# EAGLE board CT_schematic (EAGLE 7.6.0)

Size 100 x 80 mm. Coordinates in mm from the lower left corner, seen from the top.
Outline: 0,0 100,0 100,80 0,80 0,0
Copper layers (1*16): Top 0.035mm / dielectric 1.5mm / Bottom 0.035mm
Design rules "default": minimum track width 10mil, minimum drill 24mil, track to track 8mil, track to pad 8mil, pad to pad 8mil, via to via 8mil, smd to smd 8mil, copper to edge 40mil, drill to drill 8mil, minimum pad ring 10mil, minimum via ring 8mil, stop-mask expansion 4mil, vias tented up to drill 0mil, thermal gap 10mil

## Footprints (pad centres in the part's own frame; a part is rotated, then mirrored left to right if it is on the bottom)
C0603 = smd 0.8 x 0.8: 1 -0.762,0; 2 0.762,0
C0402 = smd 0.5 x 0.5: 1 -0.508,0; 2 0.508,0
C0805 = smd 1.2 x 1.3: 1 -1.016,0; 2 1.016,0
C1210 = smd 1.2 x 2.5: 1 -1.524,0; 2 1.524,0
2220 = smd 1.85 x 5.5: 1 -2.55,0; 2 2.55,0
R0603 = smd 0.8 x 0.8: 1 -0.762,0; 2 0.762,0
EXV-9H = smd 3.505 x 1.676: 1 -2.857,0; 2 2.857,0
L0603 = smd 0.8 x 0.8: 1 -0.762,0; 2 0.762,0
L1210 = smd 1.2 x 2.5: 1 -1.524,0; 2 1.524,0
DR1040 = smd 1.6 x 3.2: 1 -4.458,0; 2 4.458,0
PJ-037B_PACKAGE = drill 3.7 square: 1 12,0 | drill 3.2 square: 2 6,0
TFBGA216 = smd 0.4 x 0.4: A1 -5.6,5.6; A2 -4.8,5.6; A3 -4,5.6; A4 -3.2,5.6; A5 -2.4,5.6; A6 -1.6,5.6; A7 -0.8,5.6; A8 0,5.6; A9 0.8,5.6; A10 1.6,5.6; A11 2.4,5.6; A12 3.2,5.6; A13 4,5.6; A14 4.8,5.6; A15 5.6,5.6; B1 -5.6,4.8; B2 -4.8,4.8; B3 -4,4.8; B4 -3.2,4.8; B5 -2.4,4.8; B6 -1.6,4.8; B7 -0.8,4.8; B8 0,4.8; B9 0.8,4.8; B10 1.6,4.8; B11 2.4,4.8; B12 3.2,4.8; B13 4,4.8; B14 4.8,4.8; B15 5.6,4.8; C1 -5.6,4; C2 -4.8,4; C3 -4,4; C4 -3.2,4; C5 -2.4,4; C6 -1.6,4; C7 -0.8,4; C8 0,4; C9 0.8,4; C10 1.6,4; C11 2.4,4; C12 3.2,4; C13 4,4; C14 4.8,4; C15 5.6,4; D1 -5.6,3.2; D2 -4.8,3.2; D3 -4,3.2; D4 -3.2,3.2; D5 -2.4,3.2; D6 -1.6,3.2; D7 -0.8,3.2; D8 0,3.2; D9 0.8,3.2; D10 1.6,3.2; D11 2.4,3.2; D12 3.2,3.2; D13 4,3.2; D14 4.8,3.2; D15 5.6,3.2; E1 -5.6,2.4; E2 -4.8,2.4; E3 -4,2.4; E4 -3.2,2.4; E5 -2.4,2.4; E6 -1.6,2.4; E7 -0.8,2.4; E8 0,2.4; E9 0.8,2.4; E10 1.6,2.4; E11 2.4,2.4; E12 3.2,2.4; E13 4,2.4; E14 4.8,2.4; E15 5.6,2.4; F1 -5.6,1.6; F2 -4.8,1.6; F3 -4,1.6; F4 -3.2,1.6; F5 -2.4,1.6; F6 -1.6,1.6; F7 -0.8,1.6; F8 0,1.6; F9 0.8,1.6; F10 1.6,1.6; F11 2.4,1.6; F12 3.2,1.6; F13 4,1.6; F14 4.8,1.6; F15 5.6,1.6; G1 -5.6,0.8; G2 -4.8,0.8; G3 -4,0.8; G4 -3.2,0.8; G5 -2.4,0.8; G6 -1.6,0.8; G10 1.6,0.8; G11 2.4,0.8; G12 3.2,0.8; G13 4,0.8; G14 4.8,0.8; G15 5.6,0.8; H1 -5.6,0; H2 -4.8,0; H3 -4,0; H4 -3.2,0; H5 -2.4,0; H6 -1.6,0; H10 1.6,0; H11 2.4,0; H12 3.2,0; H13 4,0; H14 4.8,0; H15 5.6,0; J1 -5.6,-0.8; J2 -4.8,-0.8; J3 -4,-0.8; J4 -3.2,-0.8; J5 -2.4,-0.8; J6 -1.6,-0.8; J10 1.6,-0.8; J11 2.4,-0.8; J12 3.2,-0.8; J13 4,-0.8; J14 4.8,-0.8; J15 5.6,-0.8; K1 -5.6,-1.6; K2 -4.8,-1.6; K3 -4,-1.6; K4 -3.2,-1.6; K5 -2.4,-1.6; K6 -1.6,-1.6; K7 -0.8,-1.6; K8 0,-1.6; K9 0.8,-1.6; K10 1.6,-1.6; K11 2.4,-1.6; K12 3.2,-1.6; K13 4,-1.6; K14 4.8,-1.6; K15 5.6,-1.6; L1 -5.6,-2.4; L2 -4.8,-2.4; L3 -4,-2.4; L4 -3.2,-2.4; L5 -2.4,-2.4; L6 -1.6,-2.4; L7 -0.8,-2.4; L8 0,-2.4; L9 0.8,-2.4; L10 1.6,-2.4; L11 2.4,-2.4; L12 3.2,-2.4; L13 4,-2.4; L14 4.8,-2.4; L15 5.6,-2.4; M1 -5.6,-3.2; M2 -4.8,-3.2; M3 -4,-3.2; M4 -3.2,-3.2; M5 -2.4,-3.2; M6 -1.6,-3.2; M7 -0.8,-3.2; M8 0,-3.2; M9 0.8,-3.2; M10 1.6,-3.2; M11 2.4,-3.2; M12 3.2,-3.2; M13 4,-3.2; M14 4.8,-3.2; M15 5.6,-3.2; N1 -5.6,-4; N2 -4.8,-4; N3 -4,-4; N4 -3.2,-4; N5 -2.4,-4; N6 -1.6,-4; N7 -0.8,-4; N8 0,-4; N9 0.8,-4; N10 1.6,-4; N11 2.4,-4; N12 3.2,-4; N13 4,-4; N14 4.8,-4; N15 5.6,-4; P1 -5.6,-4.8; P2 -4.8,-4.8; P3 -4,-4.8; P4 -3.2,-4.8; P5 -2.4,-4.8; P6 -1.6,-4.8; P7 -0.8,-4.8; P8 0,-4.8; P9 0.8,-4.8; P10 1.6,-4.8; P11 2.4,-4.8; P12 3.2,-4.8; P13 4,-4.8; P14 4.8,-4.8; P15 5.6,-4.8; R1 -5.6,-5.6; R2 -4.8,-5.6; R3 -4,-5.6; R4 -3.2,-5.6; R5 -2.4,-5.6; R6 -1.6,-5.6; R7 -0.8,-5.6; R8 0,-5.6; R9 0.8,-5.6; R10 1.6,-5.6; R11 2.4,-5.6; R12 3.2,-5.6; R13 4,-5.6; R14 4.8,-5.6; R15 5.6,-5.6
SSOP-20 = smd 1.651 x 0.432: 1 -3.48,2.925; 2 -3.48,2.275; 3 -3.48,1.625; 4 -3.48,0.975; 5 -3.48,0.325; 6 -3.48,-0.325; 7 -3.48,-0.975; 8 -3.48,-1.625; 9 -3.48,-2.275; 10 -3.48,-2.925; 11 3.48,-2.925; 12 3.48,-2.275; 13 3.48,-1.625; 14 3.48,-0.975; 15 3.48,-0.325; 16 3.48,0.325; 17 3.48,0.975; 18 3.48,1.625; 19 3.48,2.275; 20 3.48,2.925
182-009-MALE = drill 1.194 pad 1.524 octagon: 1 -5.537,10.923; 2 -2.769,10.923; 3 0,10.923; 4 2.769,10.923; 5 5.537,10.923; 6 -4.153,8.08; 7 -1.384,8.08; 8 1.384,8.08; 9 4.153,8.08 | hole 3.048: -12.446,9.501; 12.446,9.501
PC28F512P33BFD = smd 0.45 x 0.45: A1 0,0; A2 1,0; A3 2,0; A4 3,0; A5 4,0; A6 5,0; A7 6,0; A8 7,0; B1 0,-1; B2 1,-1; B3 2,-1; B4 3,-1; B5 4,-1; B6 5,-1; B7 6,-1; B8 7,-1; C1 0,-2; C2 1,-2; C3 2,-2; C4 3,-2; C5 4,-2; C6 5,-2; C7 6,-2; C8 7,-2; D1 0,-3; D2 1,-3; D3 2,-3; D4 3,-3; D5 4,-3; D6 5,-3; D7 6,-3; D8 7,-3; E1 0,-4; E2 1,-4; E3 2,-4; E4 3,-4; E5 4,-4; E6 5,-4; E7 6,-4; E8 7,-4; F1 0,-5; F2 1,-5; F3 2,-5; F4 3,-5; F5 4,-5; F6 5,-5; F7 6,-5; F8 7,-5; G1 0,-6; G2 1,-6; G3 2,-6; G4 3,-6; G5 4,-6; G6 5,-6; G7 6,-6; G8 7,-6; H1 0,-7; H2 1,-7; H3 2,-7; H4 3,-7; H5 4,-7; H6 5,-7; H7 6,-7; H8 7,-7
VQFN-16 = smd 1.105 x 0.381: 1 -1.822,0.975; 2 -1.822,0.325; 3 -1.822,-0.325; 4 -1.822,-0.975; 9 1.822,-0.975; 10 1.822,-0.325; 11 1.822,0.325; 12 1.822,0.975 | smd 0.381 x 1.105: 5 -0.975,-1.822; 6 -0.325,-1.822; 7 0.325,-1.822; 8 0.975,-1.822; 13 0.975,1.822; 14 0.325,1.822; 15 -0.325,1.822; 16 -0.975,1.822
HTSS-105-01-G-D = drill 1 pad 1.8 square: 1 0,0 | drill 1 pad 1.8: 2 0,2.54; 3 2.54,0; 4 2.54,2.54; 5 5.08,0; 6 5.08,2.54; 7 7.62,0; 8 7.62,2.54; 9 10.16,0; 10 10.16,2.54
ABS07-32.768KHZ-7-T = smd 1.1 x 2.4: 1 -2.5,0; 2 0,0
ABLS-25.000MHZ-B2F-T = smd 5.6 x 2.8: 1 -3.81,0; 2 5.69,0
WSON-8 = smd 0.3 x 0.6: 1 -0.75,0; 2 0.05,0; 3 0.85,0; 4 1.65,0; 5 1.65,3.8; 6 0.85,3.8; 7 0.05,3.8; 8 -0.75,3.8 | smd 3 x 2.6: PAD 0.45,1.9
QFN-16_EP = smd 0.805 x 0.3: 1 -1.452,0.75; 2 -1.452,0.25; 3 -1.452,-0.25; 4 -1.452,-0.75; 9 1.452,-0.75; 10 1.452,-0.25; 11 1.452,0.25; 12 1.452,0.75 | smd 0.3 x 0.805: 5 -0.75,-1.452; 6 -0.25,-1.452; 7 0.25,-1.452; 8 0.75,-1.452; 13 0.75,1.452; 14 0.25,1.452; 15 -0.25,1.452; 16 -0.75,1.452 | smd 1.55 x 1.55: 17 0,0
QFN-38_UHF = smd 0.75 x 0.3: 1 -2.4,2.75; 2 -2.4,2.25; 3 -2.4,1.75; 4 -2.4,1.25; 6 -2.4,0.25; 7 -2.4,-0.25; 8 -2.4,-0.75; 9 -2.4,-1.25; 10 -2.4,-1.75; 11 -2.4,-2.25; 12 -2.4,-2.75; 20 2.4,-2.75; 21 2.4,-2.25; 22 2.4,-1.75; 23 2.4,-1.25; 24 2.4,-0.75; 25 2.4,-0.25; 26 2.4,0.25; 27 2.4,0.75; 28 2.4,1.25; 29 2.4,1.75; 30 2.4,2.25; 31 2.4,2.75 | smd 0.758 x 0.3: 5 -2.4,0.75 | smd 0.3 x 0.75: 13 -1.5,-3.4; 14 -1,-3.4; 15 -0.5,-3.4; 16 0,-3.4; 17 0.5,-3.4; 18 1,-3.4; 19 1.5,-3.4; 32 1.5,3.4; 33 1,3.4; 34 0.5,3.4; 35 0,3.4; 36 -0.5,3.4; 37 -1,3.4; 38 -1.5,3.4 | smd 3.2 x 5.2: 39 0,0
IRF8306MTRPBF = smd 0.9 x 1.85: 1 0,0; 2 0,-2.35; 6 6.4,0; 7 6.4,-2.35 | smd 0.75 x 0.75: 3 1.75,-1.175 | smd 1.45 x 0.87: 4 3.5,-0.565; 5 3.5,-1.785
SW_4-1437565-2 = smd 1.4 x 2.1: 1 -2.23,4.55; 2 -2.23,-4.55; 3 2.23,4.55; 4 2.23,-4.55
LGM67K-G1J2-24-Z = smd 0.8 x 1.4: A -2,0; C 0,0
NC7SZ125M5X = smd 1.3 x 0.7: 1 -1.3,0.95; 2 -1.3,0; 3 -1.3,-0.95; 4 1.3,-0.95; 5 1.3,0.95
DUMMY_PACKAGE_254 = drill 0.3: 1 0,-1; 2 1.5,-1; 3 3,-1

## Placement (x,y rotation side)
C1  1e-06  [C0603]  -57.15,73.66 0 top  (outside the outline)
C2  1e-07  [C0603]  -60.96,73.66 0 top  (outside the outline)
C3  1e-07  [C0603]  -64.77,73.66 0 top  (outside the outline)
C4  1e-07  [C0603]  -68.58,73.66 0 top  (outside the outline)
C5  1e-07  [C0603]  -72.39,73.66 0 top  (outside the outline)
C6  1e-07  [C0603]  -76.2,73.66 0 top  (outside the outline)
C7  1e-07  [C0603]  -80.01,73.66 0 top  (outside the outline)
C8  1e-07  [C0603]  -83.82,73.66 0 top  (outside the outline)
C9  1e-07  [C0603]  -15.24,78.74 0 top  (outside the outline)
C10  1e-07  [C0603]  -19.05,78.74 0 top  (outside the outline)
C11  1e-07  [C0603]  -22.86,78.74 0 top  (outside the outline)
C12  1e-07  [C0603]  -26.67,78.74 0 top  (outside the outline)
C13  1e-07  [C0603]  -30.48,78.74 0 top  (outside the outline)
C14  1e-07  [C0603]  -34.29,78.74 0 top  (outside the outline)
C15  1e-07  [C0603]  -38.1,78.74 0 top  (outside the outline)
C16  1e-07  [C0603]  -41.91,78.74 0 top  (outside the outline)
C17  1e-07  [C0603]  -45.72,78.74 0 top  (outside the outline)
C18  1e-07  [C0603]  -49.53,78.74 0 top  (outside the outline)
C19  1e-07  [C0603]  -53.34,78.74 0 top  (outside the outline)
C20  1e-07  [C0603]  -57.15,78.74 0 top  (outside the outline)
C21  1e-07  [C0603]  -60.96,78.74 0 top  (outside the outline)
C22  4.7e-06  [C0603]  -49.53,73.66 0 top  (outside the outline)
C23  1e-08  [C0603]  -64.77,78.74 0 top  (outside the outline)
C24  1e-06  [C0603]  -68.58,78.74 0 top  (outside the outline)
C25  1e-07  [C0402]  -57.15,83.82 0 top  (outside the outline)
C26  1e-07  [C0402]  -60.96,83.82 0 top  (outside the outline)
C27  1e-11  [C0402]  -64.77,83.82 0 top  (outside the outline)
C28  1e-11  [C0402]  -68.58,83.82 0 top  (outside the outline)
C29  1e-11  [C0402]  -72.39,83.82 0 top  (outside the outline)
C30  1e-11  [C0402]  -76.2,83.82 0 top  (outside the outline)
C31  1e-06  [C0603]  -72.39,78.74 0 top  (outside the outline)
C32  1e-06  [C0603]  -76.2,78.74 0 top  (outside the outline)
C33  1e-06  [C0603]  -80.01,78.74 0 top  (outside the outline)
C34  4.7e-06  [C0805]  -86.36,55.88 0 top  (outside the outline)
C35  1e-07  [C0402]  -80.01,83.82 0 top  (outside the outline)
C36  1e-08  [C0402]  -83.82,83.82 0 top  (outside the outline)
C37  1e-07  [C0402]  -87.63,83.82 0 top  (outside the outline)
C38  1e-08  [C0402]  -15.24,88.9 0 top  (outside the outline)
C39  1e-07  [C0402]  -19.05,88.9 0 top  (outside the outline)
C40  1e-08  [C0402]  -22.86,88.9 0 top  (outside the outline)
C41  1e-07  [C0402]  -26.67,88.9 0 top  (outside the outline)
C42  1e-07  [C0402]  -30.48,88.9 0 top  (outside the outline)
C43  1e-06  [C0603]  -83.82,78.74 0 top  (outside the outline)
C44  1e-08  [C0402]  -34.29,88.9 0 top  (outside the outline)
C45  1e-05  [C1210]  -48.26,57.15 0 top  (outside the outline)
C46  1e-05  [C0805]  -15.24,63.5 0 top  (outside the outline)
C47  1e-05  [C0805]  -20.32,63.5 0 top  (outside the outline)
C48  1e-06  [C0603]  -15.24,83.82 0 top  (outside the outline)
C49  1e-07  [C0402]  -38.1,88.9 0 top  (outside the outline)
C50  6.8e-05  [2220]  -57.15,39.37 0 top  (outside the outline)
C51  1e-08  [C0402]  -41.91,88.9 0 top  (outside the outline)
C52  1e-05  [C1210]  -54.61,57.15 0 top  (outside the outline)
C53  1e-05  [C0805]  -25.4,63.5 0 top  (outside the outline)
C54  1e-07  [C0402]  -45.72,88.9 0 top  (outside the outline)
C55  2.2e-06  [C0603]  -53.34,73.66 0 top  (outside the outline)
C56  2.45e-08  [R0603]  -83.82,63.5 0 top  (outside the outline)
C57  2.8258362168397e-09  [R0603]  -35.56,63.5 0 top  (outside the outline)
C58  7.105e-09  [R0603]  -48.26,63.5 0 top  (outside the outline)
C59  0.0001  [EXV-9H]  -46.99,48.26 0 top  (outside the outline)
C60  0.0001  [EXV-9H]  -58.42,48.26 0 top  (outside the outline)
C61  1e-08  [C0402]  -49.53,88.9 0 top  (outside the outline)
C62  1e-08  [C0402]  -53.34,88.9 0 top  (outside the outline)
F1  240.0  [L0603]  -19.05,83.82 0 top  (outside the outline)
I1  1.5e-05  [L1210]  -60.96,57.15 0 top  (outside the outline)
I2  5.2e-06  [DR1040]  -54.61,27.94 0 top  (outside the outline)
J1  PJ-037B  [PJ-037B_PACKAGE]  -86.36,7.62 0 top  (outside the outline)
R2  1000.0  [R0603]  -22.86,83.82 0 top  (outside the outline)
R7  4700.0  [R0603]  -26.67,83.82 0 top  (outside the outline)
R8  4700.0  [R0603]  -30.48,83.82 0 top  (outside the outline)
R9  10000.0  [R0603]  -15.24,68.58 0 top  (outside the outline)
R10  10000.0  [R0603]  -20.32,68.58 0 top  (outside the outline)
R11  10000.0  [R0603]  -25.4,68.58 0 top  (outside the outline)
R12  10000.0  [R0603]  -30.48,68.58 0 top  (outside the outline)
R13  100000.0  [R0603]  -53.34,63.5 0 top  (outside the outline)
R14  100000.0  [R0603]  -58.42,63.5 0 top  (outside the outline)
R15  100000.0  [R0603]  -63.5,63.5 0 top  (outside the outline)
R16  10000.0  [R0603]  -35.56,68.58 0 top  (outside the outline)
R17  10000.0  [R0603]  -40.64,68.58 0 top  (outside the outline)
R18  10000.0  [R0603]  -45.72,68.58 0 top  (outside the outline)
R19  10000.0  [R0603]  -50.8,68.58 0 top  (outside the outline)
R20  10000.0  [R0603]  -55.88,68.58 0 top  (outside the outline)
R21  10000.0  [R0603]  -60.96,68.58 0 top  (outside the outline)
R22  10000.0  [R0603]  -66.04,68.58 0 top  (outside the outline)
R23  100000.0  [R0603]  -68.58,63.5 0 top  (outside the outline)
R24  200.0  [R0603]  -34.29,83.82 0 top  (outside the outline)
R25  1000.0  [R0603]  -38.1,83.82 0 top  (outside the outline)
R26  20000.0  [R0603]  -71.12,68.58 0 top  (outside the outline)
R27  62000.0  [R0603]  -76.2,68.58 0 top  (outside the outline)
R28  300000.0  [R0603]  -73.66,63.5 0 top  (outside the outline)
R29  100000.0  [R0603]  -78.74,63.5 0 top  (outside the outline)
R30  200.0  [R0603]  -41.91,83.82 0 top  (outside the outline)
R31  1000.0  [R0603]  -45.72,83.82 0 top  (outside the outline)
R32  10000.0  [R0603]  -81.28,68.58 0 top  (outside the outline)
R33  75000.0  [R0603]  -86.36,68.58 0 top  (outside the outline)
R34  10000.0  [R0603]  -15.24,73.66 0 top  (outside the outline)
R35  10000.0  [R0603]  -20.32,73.66 0 top  (outside the outline)
R36  95300.0  [R0603]  -25.4,73.66 0 top  (outside the outline)
R37  95300.0  [R0603]  -30.48,73.66 0 top  (outside the outline)
R38  10000.0  [R0603]  -35.56,73.66 0 top  (outside the outline)
R39  10000.0  [R0603]  -40.64,73.66 0 top  (outside the outline)
R40  10000.0  [R0603]  -45.72,73.66 0 top  (outside the outline)
R41  111363.63636364  [R0603]  -43.18,63.5 0 top  (outside the outline)
U1  STM32F429NGH6  [TFBGA216]  -64.77,8.89 0 top  (outside the outline)
U2  MAX3218EAP+T  [SSOP-20]  -48.26,38.1 0 top  (outside the outline)
U3  182-009-113R531  [182-009-MALE]  -36.83,6.35 0 top  (outside the outline)
U4  PC28F512P33BFD  [PC28F512P33BFD]  -27.94,31.75 0 top  (outside the outline)
U5  TSC2046IRGVR  [VQFN-16]  -67.31,55.88 0 top  (outside the outline)
U6  HTSS-105-01-G-D  [HTSS-105-01-G-D]  -74.93,26.67 0 top  (outside the outline)
U7  ABS07-32.768KHZ-7-T  [ABS07-32.768KHZ-7-T]  -27.94,57.15 0 top  (outside the outline)
U8  ABLS-25.000MHZ-B2F-T  [ABLS-25.000MHZ-B2F-T]  -77.47,48.26 0 top  (outside the outline)
U9  LP3878SDX-ADJ/NOPB  [WSON-8]  -78.74,36.83 0 top  (outside the outline)
U10  LTC3601EUD#PBF  [QFN-16_EP]  -50.8,83.82 0 top  (outside the outline)
U11  LP3878SDX-ADJ/NOPB  [WSON-8]  -30.48,46.99 0 top  (outside the outline)
U12  LTC2928CUHF#PBF  [QFN-38_UHF]  -36.83,48.26 0 top  (outside the outline)
U13  IRF8306MTRPbF  [IRF8306MTRPBF]  -26.67,40.64 0 top  (outside the outline)
U14  IRF8306MTRPbF  [IRF8306MTRPBF]  -41.91,40.64 0 top  (outside the outline)
U15  4-1437565-2  [SW_4-1437565-2]  -44.45,27.94 0 top  (outside the outline)
U16  Q65110A2395  [LGM67K-G1J2-24-Z]  -36.83,57.15 0 top  (outside the outline)
U17  nc7sz125m5x  [NC7SZ125M5X]  -73.66,55.88 0 top  (outside the outline)
U18  nc7sz125m5x  [NC7SZ125M5X]  -80.01,55.88 0 top  (outside the outline)
U19  Dummy  [DUMMY_PACKAGE_254]  -59.69,88.9 0 top  (outside the outline)

## Library data of the parts
C1-C62 F1 I1 I2 J1 R2 R7-R41 U1-U19 = circuit_tree

## Nets
CLK_CRYSTAL_U1_E1: C27.1 U1.E1 U7.1
CLK_CRYSTAL_U1_F1: C28.1 U1.F1 U7.2
CLK_CRYSTAL_U1_G1: C29.1 U1.G1 U8.1
CLK_CRYSTAL_U1_H1: C30.1 U1.H1 U8.2
GND: C1.2 C2.2 C3.2 C4.2 C5.2 C6.2 C7.2 C8.2 C9.2 C10.2 C11.2 C12.2 C13.2 C14.2 C15.2 C16.2 C17.2 C18.2 C19.2 C20.2 C21.2 C22.2 C23.2 C24.2 C25.2 C26.2 C27.2 C28.2 C29.2 C30.2 C31.2 C32.2 C33.2 C35.2 C36.2 C37.2 C38.2 C39.2 C40.2 C41.2 C42.2 C43.2 C44.2 C45.2 C46.2 C47.2 C48.2 C50.1 C50.2 C51.2 C52.2 C53.2 C54.2 C55.2 C56.2 C57.2 C58.2 C59.2 C60.2 C61.2 C62.2 J1.2 R2.2 R11.2 R25.2 R26.2 R28.2 R31.2 R33.2 R36.2 R37.2 R38.2 R39.2 R40.2 U1.F2 U1.F6 U1.F7 U1.F8 U1.F9 U1.F10 U1.G6 U1.G10 U1.H6 U1.H10 U1.J6 U1.J10 U1.K6 U1.K7 U1.K8 U1.K9 U1.K10 U1.L6 U1.M1 U1.N1 U2.5 U2.17 U2.20 U3.5 U4.B2 U4.H2 U4.H4 U4.H6 U5.10 U6.9 U9.3 U9.PAD U10.1 U10.9 U10.17 U11.3 U11.PAD U12.8 U12.9 U12.10 U12.12 U12.13 U12.24 U12.25 U12.30 U12.32 U12.39 U16.C U17.1 U17.3 U18.1 U18.3 U19.1
NET_U1_E5: R9.1 U1.E5
NET_U1_E6: R10.1 U1.E6
NET_U1_E11: C26.1 U1.E11
NET_U1_J1: R8.1 U1.J1 U18.4
NET_U1_L5: R12.1 U1.L5
NET_U1_M5: R11.1 U1.M5
NET_U1_R1: C23.1 C24.1 F1.1 U1.P1 U1.R1
NET_U1_R14: U16.A
NET_U1_R15: U15.3 U15.4
NET_U2_1: I1.1 U2.1
NET_U2_2: R13.1 U2.2
NET_U2_3: R14.1 U2.3
NET_U2_4: R15.1 U2.4
NET_U2_15: C33.1 U2.15
NET_U2_16: C34.2 U2.16
NET_U2_18: C34.1 U2.18
NET_U2_19: C32.1 U2.19
NET_U3_2: U2.12 U3.2
NET_U3_3: U2.14 U3.3
NET_U3_7: U2.11 U3.7
NET_U3_8: U2.13 U3.8
NET_U4_A4: C39.1 C40.1 U4.A4
NET_U4_C6: R19.1 U4.C6
NET_U4_D4: R7.1 U4.D4 U17.4
NET_U5_15: R22.1 U5.15
NET_U6_3: U5.7 U6.3
NET_U6_4: U5.9 U6.4
NET_U6_5: U5.6 U6.5
NET_U6_6: U5.8 U6.6
NET_U9_1: C44.1 U9.1
NET_U9_6: R24.2 R25.1 U9.6
NET_U9_8: R23.1 U9.8
NET_U10_3: C49.2 I2.1 U10.3 U10.4
NET_U10_6: C49.1 U10.6
NET_U10_7: C48.1 U10.7 U10.12
NET_U10_10: R28.1 U10.10
NET_U10_11: R26.1 R27.1 U10.11
NET_U10_14: U10.14
NET_U10_ATNET_3: I2.2 R27.2
NET_U11_1: C51.1 U11.1
NET_U11_6: R30.2 R31.1 U11.6
NET_U11_8: R29.1 U11.8
NET_U12_3: R39.1 U12.3
NET_U12_6: R36.1 U12.6
NET_U12_7: R37.1 U12.7
NET_U12_16: R38.1 R41.1 U12.16
NET_U12_18: R35.1 U12.18
NET_U12_19: R34.1 U12.19 U12.20
NET_U12_21: R32.1 R33.1 U12.21 U17.2 U18.2
NET_U12_22: C54.1 R32.2 R34.2 R35.2 U12.11 U12.22
NET_U12_26: C57.1 U12.26
NET_U12_27: C56.1 U12.27
NET_U12_28: C58.1 U12.28
NET_U12_38: R40.1 U12.38
NET_U13_3: U12.2 U13.3
NET_U14_3: U12.37 U14.3
NET_U15_1: R2.1 U15.1 U15.2
PROC_ADC1_IN3: U1.R2 U19.2
PROC_ADC1_IN4: U1.N4 U19.3
PROC_FMC_A0: U1.D2 U4.A1
PROC_FMC_A1: U1.E2 U4.B1
PROC_FMC_A2: U1.G2 U4.C1
PROC_FMC_A3: U1.H2 U4.D1
PROC_FMC_A4: U1.J2 U4.D2
PROC_FMC_A5: U1.K3 U4.A2
PROC_FMC_A6: U1.M6 U4.C2
PROC_FMC_A7: U1.N6 U4.A3
PROC_FMC_A8: U1.P6 U4.B3
PROC_FMC_A9: U1.M8 U4.C3
PROC_FMC_A10: U1.N7 U4.D3
PROC_FMC_A11: U1.M7 U4.C4
PROC_FMC_A12: U1.M13 U4.A5
PROC_FMC_A13: U1.M12 U4.B5
PROC_FMC_A14: U1.N12 U4.C5
PROC_FMC_A15: U1.N11 U4.D7
PROC_FMC_A16: U1.N10 U4.D8
PROC_FMC_A17: U1.M10 U4.A7
PROC_FMC_A18: U1.M11 U4.B7
PROC_FMC_A19: U1.A2 U4.C7
PROC_FMC_A20: U1.A1 U4.C8
PROC_FMC_A21: U1.B1 U4.A8
PROC_FMC_A22: U1.B2 U4.G1
PROC_FMC_A23: U1.A3 U4.H8
PROC_FMC_A24: U1.B3 U4.B6
PROC_FMC_CLK: U1.C11 U4.E6
PROC_FMC_D0: U1.L12 U4.F2
PROC_FMC_D1: U1.K13 U4.E2
PROC_FMC_D2: U1.B12 U4.G3
PROC_FMC_D3: U1.C12 U4.E4
PROC_FMC_D4: U1.R8 U4.E5
PROC_FMC_D5: U1.N9 U4.G5
PROC_FMC_D6: U1.P9 U4.G6
PROC_FMC_D7: U1.R9 U4.H7
PROC_FMC_D8: U1.P10 U4.E1
PROC_FMC_D9: U1.R10 U4.E3
PROC_FMC_D10: U1.R12 U4.F3
PROC_FMC_D11: U1.P11 U4.F4
PROC_FMC_D12: U1.R11 U4.F5
PROC_FMC_D13: U1.L15 U4.H5
PROC_FMC_D14: U1.L14 U4.G7
PROC_FMC_D15: U1.K15 U4.E7
PROC_FMC_NE2: R17.1 U1.D9 U4.B4
PROC_FMC_NL: R16.1 U1.B5 U4.F6
PROC_FMC_NOE: R18.1 U1.D11 U4.F8
PROC_FMC_NWAIT: U1.B11 U4.F7
PROC_FMC_NWE: R20.1 U1.C10 U4.G8
PROC_SPI1_MISO: U1.A9 U5.16
PROC_SPI1_MOSI: U1.A8 U5.2
PROC_SPI1_NSS: R21.1 U1.A13 U5.3
PROC_SPI1_SCK: U1.A10 U5.4
PROC_UART4_RX: U1.B13 U2.9
PROC_UART4_TX: U1.B14 U2.7
VCC_13V6: C55.1 C59.1 C60.1 J1.1 R41.2 U12.23 U13.1 U13.2 U13.6 U13.7 U14.1 U14.2 U14.6 U14.7
VCC_S1_13V6: C45.1 C47.1 R23.2 U9.4 U10.15 U10.16 U13.4 U13.5
VCC_S2_13V6: C52.1 R29.2 U11.4 U14.4 U14.5
VCC_TIER1_1V2: C25.1 C46.1 R24.1 U1.L11 U9.5
VCC_TIER1_2V5: C1.1 C2.1 C3.1 C4.1 C5.1 C6.1 C7.1 C8.1 C9.1 C10.1 C11.1 C12.1 C13.1 C14.1 C15.1 C16.1 C17.1 C18.1 C19.1 C20.1 C21.1 C22.1 C31.1 C35.1 C36.1 C37.1 C38.1 C41.1 C42.1 C43.1 C50.2 C61.1 C62.1 F1.2 I1.2 I2.2 R7.2 R8.2 R9.2 R10.2 R12.2 R13.2 R14.2 R15.2 R16.2 R17.2 R18.2 R19.2 R20.2 R21.2 R22.2 R27.2 U1.C1 U1.E7 U1.E8 U1.E9 U1.E10 U1.F4 U1.F5 U1.F11 U1.G5 U1.G11 U1.H5 U1.H11 U1.J5 U1.J11 U1.K5 U1.K11 U1.L7 U1.L8 U1.L9 U1.L10 U2.6 U4.A6 U4.D5 U4.D6 U4.G4 U4.H3 U5.5 U5.14 U10.8 U17.5 U18.5
VCC_TIER2_1V2: C53.1 R30.1 U11.5

## Tracks (layer width: path | path; a pad name or v marks a point on that pad's centre or on a via)
CLK_CRYSTAL_U1_E1  (2 unrouted)
CLK_CRYSTAL_U1_F1  (2 unrouted)
CLK_CRYSTAL_U1_G1  (2 unrouted)
CLK_CRYSTAL_U1_H1  (2 unrouted)
GND  (126 unrouted)
NET_U1_E5  (1 unrouted)
NET_U1_E6  (1 unrouted)
NET_U1_E11  (1 unrouted)
NET_U1_J1  (2 unrouted)
NET_U1_L5  (1 unrouted)
NET_U1_M5  (1 unrouted)
NET_U1_R1  (4 unrouted)
NET_U1_R15  (1 unrouted)
NET_U2_1  (1 unrouted)
NET_U2_2  (1 unrouted)
NET_U2_3  (1 unrouted)
NET_U2_4  (1 unrouted)
NET_U2_15  (1 unrouted)
NET_U2_16  (1 unrouted)
NET_U2_18  (1 unrouted)
NET_U2_19  (1 unrouted)
NET_U3_2  (1 unrouted)
NET_U3_3  (1 unrouted)
NET_U3_7  (1 unrouted)
NET_U3_8  (1 unrouted)
NET_U4_A4  (2 unrouted)
NET_U4_C6  (1 unrouted)
NET_U4_D4  (2 unrouted)
NET_U5_15  (1 unrouted)
NET_U6_3  (1 unrouted)
NET_U6_4  (1 unrouted)
NET_U6_5  (1 unrouted)
NET_U6_6  (1 unrouted)
NET_U9_1  (1 unrouted)
NET_U9_6  (2 unrouted)
NET_U9_8  (1 unrouted)
NET_U10_3  (3 unrouted)
NET_U10_6  (1 unrouted)
NET_U10_7  (2 unrouted)
NET_U10_10  (1 unrouted)
NET_U10_11  (2 unrouted)
NET_U10_ATNET_3  (1 unrouted)
NET_U11_1  (1 unrouted)
NET_U11_6  (2 unrouted)
NET_U11_8  (1 unrouted)
NET_U12_3  (1 unrouted)
NET_U12_6  (1 unrouted)
NET_U12_7  (1 unrouted)
NET_U12_16  (2 unrouted)
NET_U12_18  (1 unrouted)
NET_U12_19  (2 unrouted)
NET_U12_21  (4 unrouted)
NET_U12_22  (5 unrouted)
NET_U12_26  (1 unrouted)
NET_U12_27  (1 unrouted)
NET_U12_28  (1 unrouted)
NET_U12_38  (1 unrouted)
NET_U13_3  (1 unrouted)
NET_U14_3  (1 unrouted)
NET_U15_1  (2 unrouted)
PROC_ADC1_IN3  (1 unrouted)
PROC_ADC1_IN4  (1 unrouted)
PROC_FMC_A0  (1 unrouted)
PROC_FMC_A1  (1 unrouted)
PROC_FMC_A2  (1 unrouted)
PROC_FMC_A3  (1 unrouted)
PROC_FMC_A4  (1 unrouted)
PROC_FMC_A5  (1 unrouted)
PROC_FMC_A6  (1 unrouted)
PROC_FMC_A7  (1 unrouted)
PROC_FMC_A8  (1 unrouted)
PROC_FMC_A9  (1 unrouted)
PROC_FMC_A10  (1 unrouted)
PROC_FMC_A11  (1 unrouted)
PROC_FMC_A12  (1 unrouted)
PROC_FMC_A13  (1 unrouted)
PROC_FMC_A14  (1 unrouted)
PROC_FMC_A15  (1 unrouted)
PROC_FMC_A16  (1 unrouted)
PROC_FMC_A17  (1 unrouted)
PROC_FMC_A18  (1 unrouted)
PROC_FMC_A19  (1 unrouted)
PROC_FMC_A20  (1 unrouted)
PROC_FMC_A21  (1 unrouted)
PROC_FMC_A22  (1 unrouted)
PROC_FMC_A23  (1 unrouted)
PROC_FMC_A24  (1 unrouted)
PROC_FMC_CLK  (1 unrouted)
PROC_FMC_D0  (1 unrouted)
PROC_FMC_D1  (1 unrouted)
PROC_FMC_D2  (1 unrouted)
PROC_FMC_D3  (1 unrouted)
PROC_FMC_D4  (1 unrouted)
PROC_FMC_D5  (1 unrouted)
PROC_FMC_D6  (1 unrouted)
PROC_FMC_D7  (1 unrouted)
PROC_FMC_D8  (1 unrouted)
PROC_FMC_D9  (1 unrouted)
PROC_FMC_D10  (1 unrouted)
PROC_FMC_D11  (1 unrouted)
PROC_FMC_D12  (1 unrouted)
PROC_FMC_D13  (1 unrouted)
PROC_FMC_D14  (1 unrouted)
PROC_FMC_D15  (1 unrouted)
PROC_FMC_NE2  (2 unrouted)
PROC_FMC_NL  (2 unrouted)
PROC_FMC_NOE  (2 unrouted)
PROC_FMC_NWAIT  (1 unrouted)
PROC_FMC_NWE  (2 unrouted)
PROC_SPI1_MISO  (1 unrouted)
PROC_SPI1_MOSI  (1 unrouted)
PROC_SPI1_NSS  (2 unrouted)
PROC_SPI1_SCK  (1 unrouted)
PROC_UART4_RX  (1 unrouted)
PROC_UART4_TX  (1 unrouted)
VCC_13V6  (13 unrouted)
VCC_S1_13V6  (7 unrouted)
VCC_S2_13V6  (4 unrouted)
VCC_TIER1_1V2  (4 unrouted)
VCC_TIER1_2V5  (82 unrouted)
VCC_TIER2_1V2  (2 unrouted)